# EAGLE board smart well (EAGLE 7.2.0)
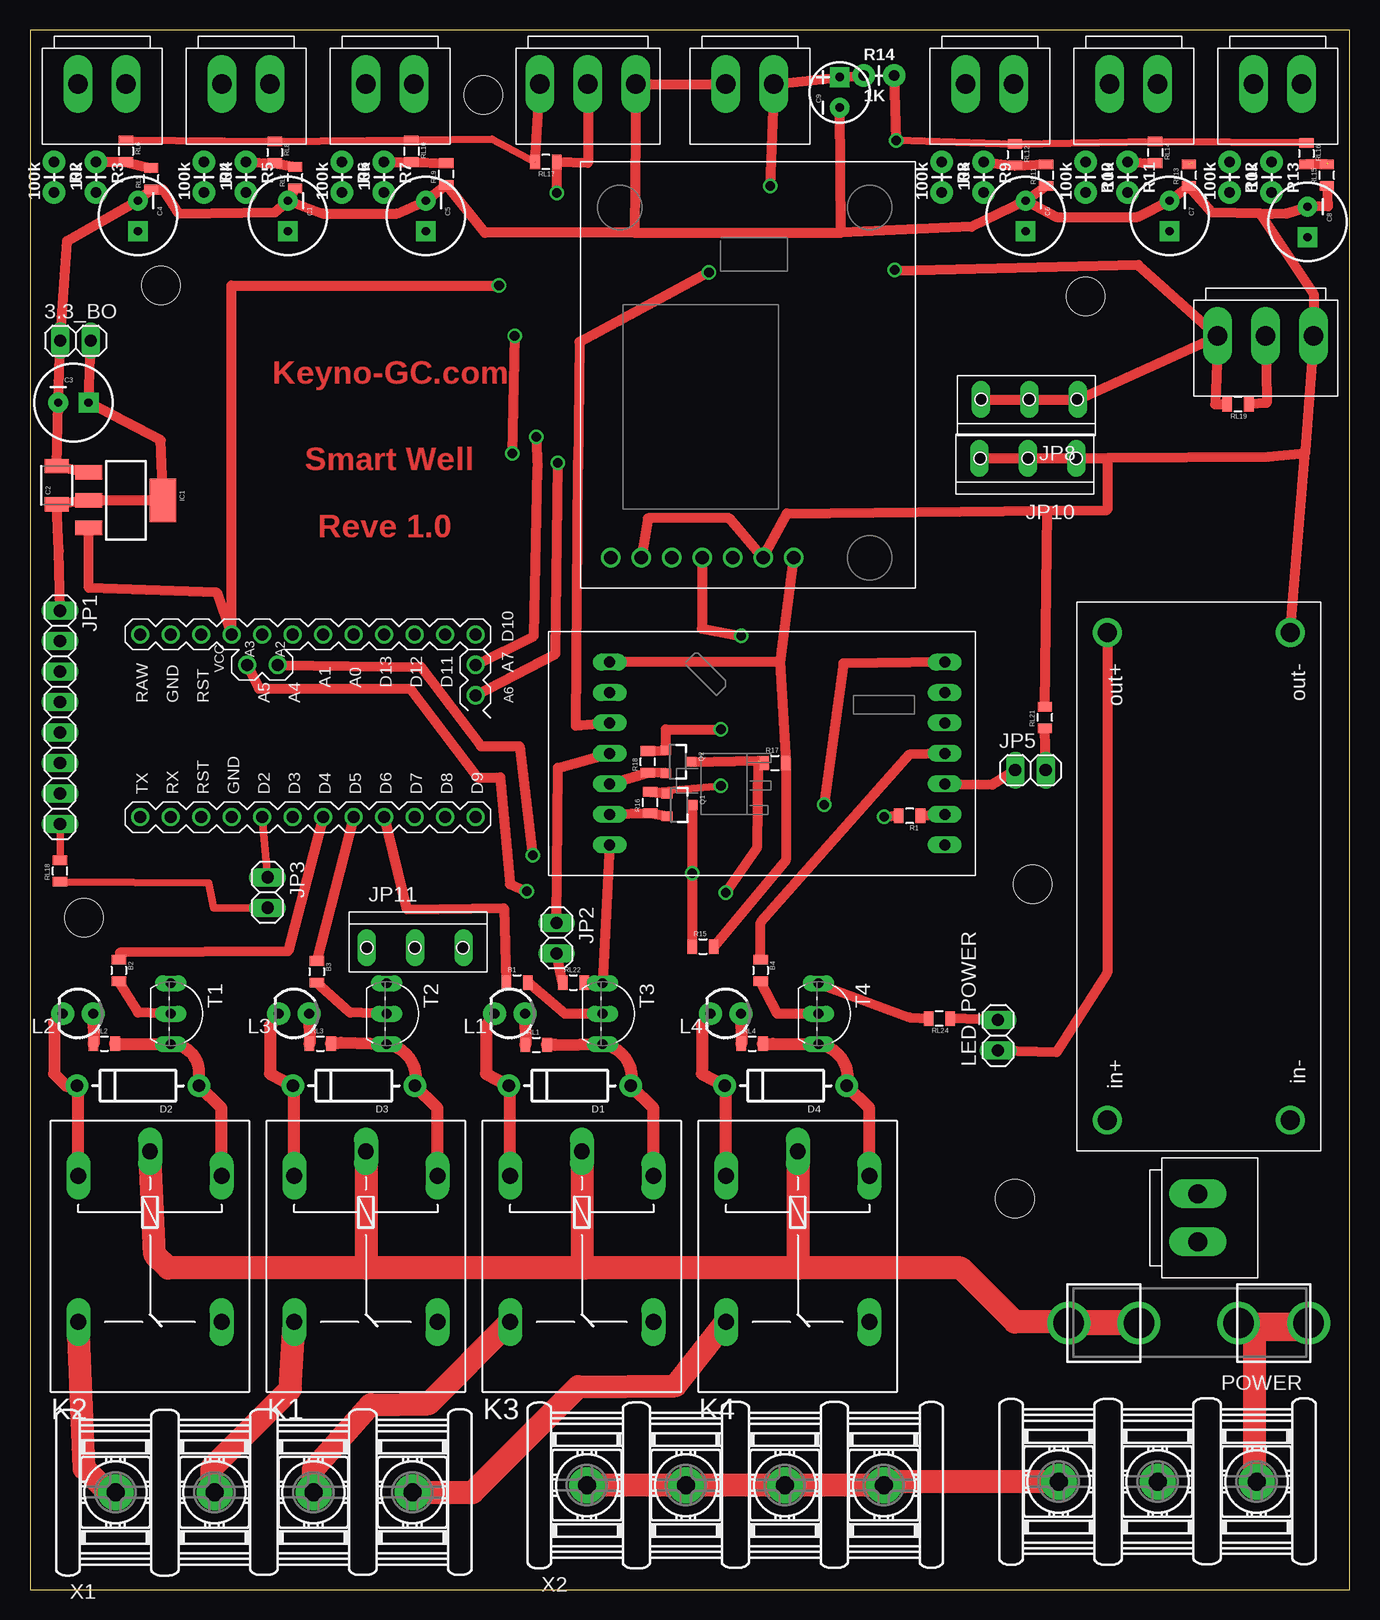
[diagram p0: board, top side]
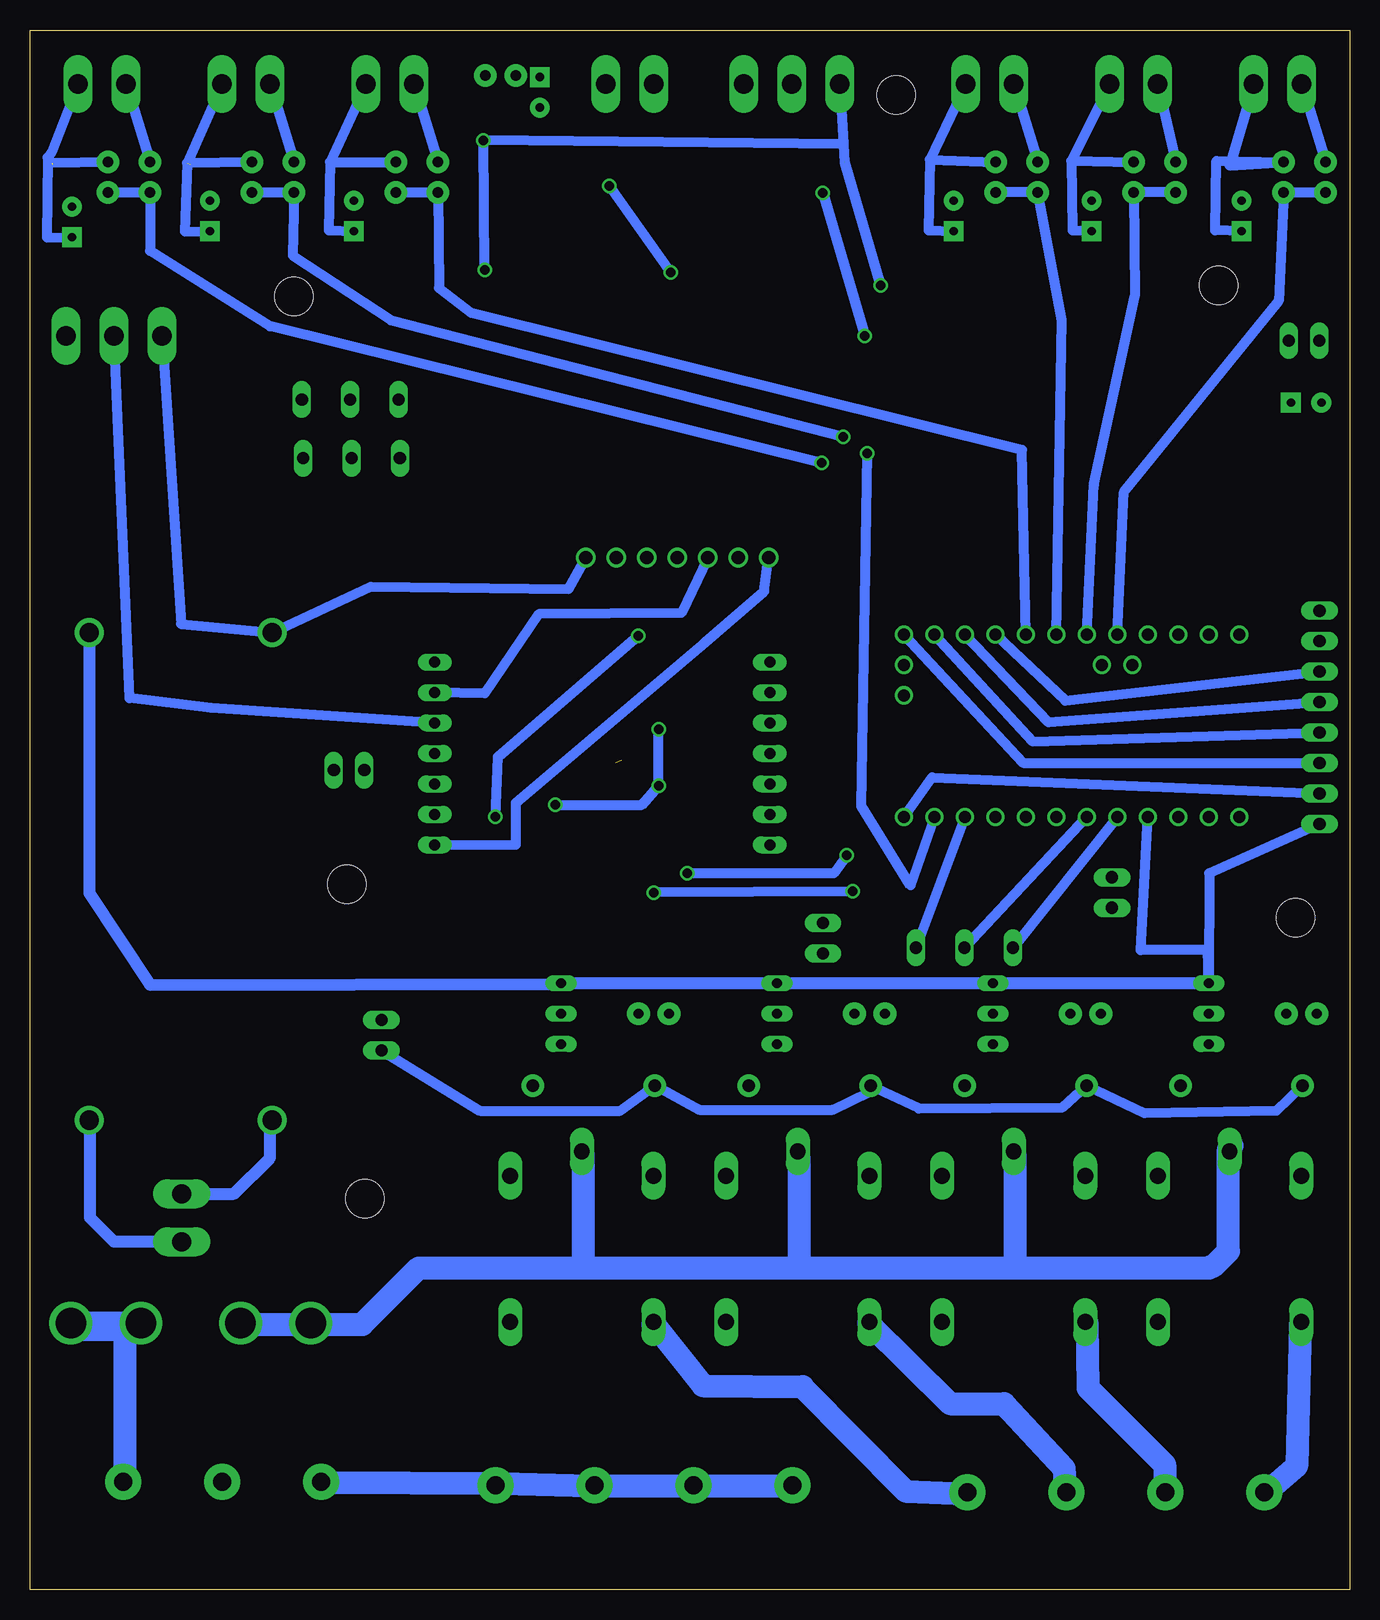
[diagram p1: board, bottom side, seen from below]

Size 110 x 130 mm. Coordinates in mm from the lower left corner, seen from the top.
Outline: 0,0 110,0 110,130 0,130 0,0
Copper layers (1*16): Top 0.035mm / dielectric 1.5mm / Bottom 0.035mm
Design rules "default *": minimum track width 20mil, minimum drill 24mil, track to track 8mil, track to pad 8mil, pad to pad 8mil, via to via 8mil, smd to smd 8mil, copper to edge 40mil, drill to drill 8mil, minimum pad ring 10mil, minimum via ring 8mil, stop-mask expansion 4mil, vias tented up to drill 0mil, thermal gap 10mil
Holes 3.2 mm at 82.1,32.6 4.5,56 83.6,58.8 10.9,108.7 88,107.8 37.8,124.6

## Footprints (pad centres in the part's own frame; a part is rotated, then mirrored left to right if it is on the bottom)
1X02 = drill 1.016 long: 1 -1.27,0; 2 1.27,0
0805 = smd 0.8 x 1.2: 1 -0.9,0; 2 0.9,0
CPOL-RADIAL-100UF-25V = drill 0.7 pad 1.651 square: 1 1.27,0 | drill 0.7 pad 1.651: 2 -1.27,0
1210 = smd 1.2 x 2: 1 -1.6,0; 2 1.6,0
CPOL-RADIAL-10UF-25V-KIT = drill 0.7 pad 1.651 square: 1 1.27,0 | drill 0.7 pad 1.651: 2 -1.27,0
PIN_LOCK1X2 = drill 1.6 long: P$1 -2,0; P$2 2,0
DIODE-1N4001-KIT = drill 1.016 pad 1.88: A -5.08,0; C 5.08,0
FUSE_5MM = drill 2.54 pad 3.556: 1 0,-10; 2 0,-4.158; 3 0,4.158; 4 0,10
SOT223 = smd 1.219 x 2.235: 1 -2.311,-3.099; 2 0,-3.099; 3 2.311,-3.099 | smd 3.6 x 2.2: 4 0,3.099
1X08 = drill 1.016 long: 1 -8.89,0; 2 -6.35,0; 3 -3.81,0; 4 -1.27,0; 5 1.27,0; 6 3.81,0; 7 6.35,0; 8 8.89,0
1X03 = drill 1.016 long: 1 -4.04,0; 2 0,0; 3 4.04,0
G5LE = drill 1.321 long: 1 -7.493,-5.969; 2 -7.493,5.969; O 4.699,5.969; P -9.525,0; S 4.699,-5.969
LED3MM = drill 0.813 pad 1.88: A -1.27,0; K 1.27,0
5202-03-N-02 = drill 1.5 pad 3: 1 -8.25,0; 2 0,0; 3 8.25,0
SOT23-3 = smd 0.8 x 0.9: 1 -0.95,-1; 2 0.95,-1; 3 0,1.1
AXIAL-0.1 = drill 0.9 pad 1.88: P$1 0,0; P$2 2.54,0
TO92-EBC-OVAL = drill 0.813 long: B 0,-1.27; C 2.54,-1.27; E -2.54,-1.27
PIN_LOCK1X3 = drill 1.6 long: P$1 4,0; P$2 0,0; P$3 -4,0
ESP12F_SHEILD10PIN = drill 0.9 long: 0 -7.62,-13.97; 2 -2.54,-13.97; 3.3V 7.62,-13.97; 4 -5.08,13.97; 5 -2.54,13.97; 5V 7.62,13.97; 12 2.54,-13.97; 13 5.08,-13.97; 14 0,-13.97; 15 -5.08,-13.97; 16 0,13.97; ADC 2.54,13.97; GND1 -7.62,13.97; RST 5.08,13.97
SIM800L = drill 1.1: 5V 7.62,-12.7; GND -5.08,-12.7; GND. 5.08,-12.7; RST -7.62,-12.7; RX -2.54,-12.7; TX 0,-12.7; VDD 2.54,-12.7
DC-DC = drill 1.6: I+ 22.86,-7.62; I- 22.86,7.62; O+ -17.78,-7.62; O- -17.78,7.62
ARDUINO_DIP = drill 1: A0 7.62,-5.08; A1 7.62,-2.54; A2 7.62,0; A3 7.62,2.54; A4 5.08,1.27; A5 5.08,3.81; A6 2.54,-15.24; A7 5.08,-15.24; D2 -7.62,2.54; D3 -7.62,0; D4 -7.62,-2.54; D5 -7.62,-5.08; D6 -7.62,-7.62; D7 -7.62,-10.16; D8 -7.62,-12.7; D9 -7.62,-15.24; D10 7.62,-15.24; D11 7.62,-12.7; D12 7.62,-10.16; D13 7.62,-7.62; GND 7.62,10.16; GND2 -7.62,5.08; RAW 7.62,12.7; RST 7.62,7.62; RST2 -7.62,7.62; RX -7.62,10.16; TX -7.62,12.7; VCC 7.62,5.08
5202-04-N-02 = drill 1.5 pad 3: 1 -12.375,0; 2 -4.125,0; 3 4.125,0; 4 12.375,0

## Placement (x,y rotation side)
3.3_BO  [1X02]  3.8,104.1 0 top
B1  0.22  [0805]  40.6,50.6 0 top
B2  0.22  [0805]  7.4,51.6 270 top
B3  0.22  [0805]  23.9,51.5 270 top
B4  0.22  [0805]  60.9,51.6 270 top
C1  [CPOL-RADIAL-100UF-25V]  21.5,114.5 270 top
C2  10uF  [1210]  2.23,92.05 90 top
C3  [CPOL-RADIAL-100UF-25V]  3.62,98.94 0 top
C4  [CPOL-RADIAL-100UF-25V]  9,114.5 270 top
C5  [CPOL-RADIAL-100UF-25V]  33,114.5 270 top
C6  [CPOL-RADIAL-100UF-25V]  83,114.5 270 top
C7  [CPOL-RADIAL-100UF-25V]  95,114.5 270 top
C8  [CPOL-RADIAL-100UF-25V]  106.5,114 270 top
C9  [CPOL-RADIAL-10UF-25V-KIT]  67.5,124.8 90 top
CT1  ct1  [PIN_LOCK1X2]  6,125.5 0 top
CT2  ct1  [PIN_LOCK1X2]  18,125.5 0 top
CT3  ct1  [PIN_LOCK1X2]  30,125.5 0 top
CT4  ct1  [PIN_LOCK1X2]  80,125.5 0 top
CT5  ct1  [PIN_LOCK1X2]  92,125.5 0 top
CT6  ct1  [PIN_LOCK1X2]  104,125.5 0 top
D1  [DIODE-1N4001-KIT]  45,42 180 top
D2  [DIODE-1N4001-KIT]  9,42 180 top
D3  [DIODE-1N4001-KIT]  27,42 180 top
D4  [DIODE-1N4001-KIT]  63,42 180 top
F1  FUSEX20MM  [FUSE_5MM]  96.6,22.2 270 top
IC1  [SOT223]  8,90.8 270 top
JP1  [1X08]  2.5,72.7 270 top
JP2  [1X02]  43.9,54.3 270 top
JP3  [1X02]  19.8,58.1 270 top
JP5  [1X02]  83.4,68.3 0 top
JP8  [1X03]  83.3,99.2 180 top
JP10  [1X03]  83.2,94.3 180 top
JP11  [1X03]  32.1,53.5 0 top
K1  relay 1  [G5LE]  28,27 270 top
K2  relay 1  [G5LE]  10,27 270 top
K3  relay 1  [G5LE]  46,27 270 top
K4  relay 1  [G5LE]  64,27 270 top
L1  [LED3MM]  40,48 180 top
L2  [LED3MM]  4,48 180 top
L3  [LED3MM]  22,48 180 top
L4  [LED3MM]  58,48 180 top
LED_POWER  LED Power  [1X02]  80.7,46.2 90 top
POWER  [5202-03-N-02]  94,9 180 top
Q1  BSS138  [SOT23-3]  54.1,65.4 270 top
Q2  BSS138  [SOT23-3]  54,69 270 top
R1  [0805]  73.33,64.49 180 top
R2  100k  [AXIAL-0.1]  2,119 270 top
R3  10k  [AXIAL-0.1]  5.5,119 270 top
R4  100k  [AXIAL-0.1]  14.5,119 270 top
R5  10k  [AXIAL-0.1]  18,119 270 top
R6  100k  [AXIAL-0.1]  26,119 270 top
R7  10k  [AXIAL-0.1]  29.5,119 270 top
R8  100k  [AXIAL-0.1]  76,119 270 top
R9  10k  [AXIAL-0.1]  79.5,119 270 top
R10  100k  [AXIAL-0.1]  88,119 270 top
R11  10k  [AXIAL-0.1]  91.5,119 270 top
R12  100k  [AXIAL-0.1]  100,119 270 top
R13  10k  [AXIAL-0.1]  103.5,119 270 top
R14  1K  [AXIAL-0.1]  69.5,126.2 0 top
R15  [0805]  56.1,53.6 0 top
R16  [0805]  51.7,65.6 90 top
R17  [0805]  62.1,68.9 0 top
R18  [0805]  51.5,69 90 top
RL1  0.22  [0805]  42.2,45.4 0 top
RL2  0.22  [0805]  6.2,45.5 0 top
RL3  0.22  [0805]  24.2,45.5 0 top
RL4  0.22  [0805]  60.2,45.5 0 top
RL5  0.22  [0805]  10.1,117.6 90 top
RL6  0.22  [0805]  8,119.9 270 top
RL7  0.22  [0805]  22.1,117.7 90 top
RL8  0.22  [0805]  20.4,119.8 270 top
RL9  0.22  [0805]  34.7,118 90 top
RL10  0.22  [0805]  31.8,119.9 270 top
RL11  0.22  [0805]  84.7,117.9 90 top
RL12  0.22  [0805]  82.1,119.6 270 top
RL13  0.22  [0805]  96.6,117.9 90 top
RL14  0.22  [0805]  93.8,119.8 270 top
RL15  0.22  [0805]  108.1,117.9 90 top
RL16  0.22  [0805]  106.4,119.7 270 top
RL17  [0805]  43,119 180 top
RL18  [0805]  2.5,59.9 90 top
RL19  [0805]  100.7,98.8 180 top
RL21  [0805]  84.6,72.7 90 top
RL22  [0805]  45.3,50.6 0 top
RL24  [0805]  75.8,47.6 180 top
T1  2N2222  [TO92-EBC-OVAL]  13,48 270 top
T2  2N2222  [TO92-EBC-OVAL]  31,48 270 top
T3  2N2222  [TO92-EBC-OVAL]  49,48 270 top
T4  2N2222  [TO92-EBC-OVAL]  67,48 270 top
U$2  PIN_LOCK_1X3  [PIN_LOCK1X3]  46.5,125.5 0 top
U$3  ESP12F_SHEILD10PIN  [ESP12F_SHEILD10PIN]  62.29,69.69 90 top
U$5  SIM800L  [SIM800L]  56.04,98.71 0 top
U$6  [DC-DC]  97.44,61.98 270 top
U$7  ARDUINO_DIP  [ARDUINO_DIP]  21.9,72 90 top
U$8  PIN_LOCK_1X3  [PIN_LOCK1X3]  103,104.5 0 top
U$9  PIN_LOCK_1X2  [PIN_LOCK1X2]  97.35,30.99 90 top
U$11  PIN_LOCK_1X2  [PIN_LOCK1X2]  60,125.5 0 top
X1  relay rail  [5202-04-N-02]  19.5,8.1 0 top
X2  phase  [5202-04-N-02]  58.8,8.7 0 top

## Library data of the parts
3.3_BO JP1-JP3 JP5 JP8 JP10 JP11 LED_POWER = pinhead2
B1-B4 R15-R18 RL1-RL19 RL21 RL22 RL24 = SparkFun-Resistors; PROD_ID: RES-09883
C1 C3-C8 = SparkFun-Capacitors; PROD_ID: CAP-08439
C2 = SparkFun-Capacitors; PROD_ID: CAP-09824
C9 = SparkFun-Capacitors; PROD_ID: CAP-08440
CT1-CT6 U$2 U$8 U$9 U$11 = ARDUINO_MODULE
D1-D4 = SparkFun-DiscreteSemi
F1 = SparkFun-Passives
IC1 = SparkFun-PowerIC; PROD_ID: VREG-08170
K1-K4 = relay; OC_FARNELL: unknown; OC_NEWARK: unknown
L1-L4 = SparkFun-LED
POWER X1 X2 = con-ebyelectro; OC_FARNELL: unknown; OC_NEWARK: unknown
Q1 Q2 = SparkFun-DiscreteSemi; PROD_ID: TRANS-00830
R1 = SparkFun-Resistors; PROD_ID: RES-11622
R2-R13 = SparkFun-Resistors; PROD_ID: RES-10698
R14 = SparkFun-Resistors; PROD_ID: RES-12182
T1-T4 = adafruit
U$3 U$5 U$6 = mysocket
U$7 = arduinopromini

## Nets
0: U$3.0 U$5.RST
3.3V_E: Q1.1 Q2.1 R16.2 R18.2 U$3.3.3V
+3V3: 3.3_BO.2 C2.1 C3.1 IC1.2 IC1.4 JP1.1
+5V: D1.C D2.C D3.C D4.C IC1.3 JP8.1 JP8.2 JP8.3 K1.1 K2.1 K3.1 K4.1 L1.K L2.K L3.K L4.K LED_POWER.1 R14.P$2 R15.2 R17.2 RL6.1 RL8.1 RL10.1 RL12.1 RL14.1 RL16.1 RL17.2 RL19.2 U$2.P$3 U$3.5V U$5.5V U$6.O+ U$7.VCC U$8.P$3
ADC_ESP: C9.1 R14.P$1 U$3.ADC U$11.P$2
CE: JP1.7 U$7.D9
CS: JP1.6 U$7.D10
CT1: R2.P$2 R3.P$2 U$7.A3
CT2: R6.P$2 R7.P$2 U$7.A1
CT3: R4.P$2 R5.P$2 U$7.A2
D2: JP3.1 JP11.1 U$7.D2
D3: JP11.2 U$7.D3
D7: JP11.3 U$7.D7
GND: 3.3_BO.1 C1.2 C2.2 C3.2 C4.2 C5.2 C6.2 C7.2 C8.2 C9.2 IC1.1 JP1.8 JP10.1 JP10.2 JP10.3 RL5.1 RL7.1 RL9.1 RL11.1 RL13.1 RL15.1 RL18.2 RL21.2 RL22.2 RL24.2 T1.E T2.E T3.E T4.E U$2.P$1 U$3.GND1 U$5.GND U$5.GND. U$6.O- U$7.GND2 U$8.P$1 U$11.P$1
IRQ: JP1.2
LED_MOTOR: JP5.1 U$3.2
LED_SIM: JP2.1 U$3.16
MISO: JP1.4 U$7.D12
MOSI: JP1.5 U$7.D11
N$1: R1.1 U$3.15
N$2: U$7.GND
N$6: U$6.I+ U$9.P$2
N$7: D2.A K2.2 RL2.2 T1.C
N$8: D3.A K1.2 RL3.2 T2.C
N$9: B2.2 T1.B
N$10: B3.2 T2.B
N$11: L2.A RL2.1
N$12: L3.A RL3.1
N$13: F1.3 POWER.1
N$14: D1.A K3.2 RL1.2 T3.C
N$15: L1.A RL1.1
N$16: B1.2 T3.B
N$17: D4.A K4.2 RL4.2 T4.C
N$18: L4.A RL4.1
N$19: B4.2 T4.B
N$20: U$6.I- U$9.P$1
N$21: CT2.P$1 R4.P$1
N$22: CT1.P$1 R2.P$1
N$23: C4.1 CT1.P$2 R3.P$1 RL5.2 RL6.2
N$24: C1.1 CT2.P$2 R5.P$1 RL7.2 RL8.2
N$25: CT3.P$1 R6.P$1
N$26: C5.1 CT3.P$2 R7.P$1 RL9.2 RL10.2
N$27: CT4.P$1 R8.P$1
N$28: C6.1 CT4.P$2 R9.P$1 RL11.2 RL12.2
N$29: CT5.P$1 R10.P$1
N$30: C7.1 CT5.P$2 R11.P$1 RL13.2 RL14.2
N$31: CT6.P$1 R12.P$1
N$32: C8.1 CT6.P$2 R13.P$1 RL15.2 RL16.2
N$35: JP5.2 RL21.1
N$36: JP2.2 RL22.1
N$38: LED_POWER.2 RL24.1
N$44: JP3.2 RL18.1
NULL: POWER.3 X2.1 X2.2 X2.3 X2.4
PHASE: F1.1 K1.P K2.P K3.P K4.P
R1: K2.S X1.1
R2: K1.S X1.2
R3: K3.S X1.3
R4: K4.S X1.4
RELAY14_ESP: B4.1 U$3.14
RI1: B2.1 U$7.D4
RI2: B3.1 U$7.D5
RI3: B1.1 U$7.D6
RX_ESP: R1.2 U$5.TX
S_D_A_D8: RL17.1 U$2.P$2 U$7.D8
S_D_ESP: RL19.1 U$3.12 U$8.P$2
SCK: JP1.3 U$7.D13
SCL: Q1.3 R15.1 U$7.A4
SCLE: Q1.2 R16.1 U$3.4
SDA: Q2.3 R17.1 U$7.A5
SDAE: Q2.2 R18.1 U$3.5
TX_ESP: U$3.13 U$5.RX
VU: R12.P$2 R13.P$2 U$7.A6
VV: R10.P$2 R11.P$2 U$7.A7
VW: R8.P$2 R9.P$2 U$7.A0

## Tracks (layer width: path | path; a pad name or v marks a point on that pad's centre or on a via)
0
  Bottom 0.813: U$3.0 69.5,62.1 69.5,65.6 53.7,79 48.8,83.2 U$5.RST
3.3V_E  (via drill 0.8)
  Top 0.61: R16.2 v57.6,67
  Top 0.813: R18.2 Q2.1 53,71.7 v57.6,71.7 | R16.2 Q1.1 | U$3.3.3V 67.8,77.2 v66.2,65.4
  Bottom 0.813: v57.6,71.7 v57.6,67 59,65.4 v66.2,65.4
+3V3
  Top 0.813: JP1.1 2.4,86.6 C2.1 IC1.2 IC1.4 10.9,95.8 C3.1 3.3_BO.2
+5V  (via drill 0.6, 0.8)  (1 unrouted)
  Top 0.61: RL6.1 RL8.1 RL10.1 38.5,120.9 RL17.2 | RL16.1 RL14.1 RL12.1 v72.2,120.8
  Top 0.813: U$8.P$3 98.8,98.8 RL19.2 | U$6.O+ 89.8,51.4 85.6,44.8 LED_POWER.1 | 56,43 v57.8,42 | RL17.2 42.5,125.6 | R14.P$2 v72.2,120.8 | U$5.5V 62.5,77.3 | 62.5,77.3 R17.2 63,60.8 R15.2 | 62.5,77.3 U$3.5V | U$8.P$3 92.4,110.4 72.1,109.9 v72.1,110 | IC1.3 4.9,83.5 15.6,83.1 U$7.VCC 16.8,108.7 v39.1,108.7 | JP8.3 JP8.2 JP8.1 U$8.P$3
  Top 1.016: K2.1 v4.03,41.89 D2.C 3,42 2,43 2,47.27 L2.K | K1.1 22.03,41.89 D3.C 20,43 20,47 L3.K | K3.1 40.03,41.89 D1.C 38,43 38,47 L1.K | K4.1 58.03,34.97 58,35 58,41.92 D4.C 56,43 56,47 L4.K
  Bottom 0.813: LED_POWER.1 72.5,39.9 60.8,39.9 D4.C | v57.8,42 54.2,40 43.1,40 40.03,41.5 D1.C 35.9,40.1 23.9,40.2 D3.C 17.1,39.7 6.1,39.9 v4.03,41.89 | U$8.P$3 97.4,80.5 U$6.O+ 81.6,83.6 65.1,83.4 U$5.5V | v72.1,110 v72.2,120.8 42.2,120.5 U$2.P$3 RL17.2 v39.1,108.7
ADC_ESP  (via drill 0.8)
  Top 0.813: R14.P$1 C9.1 U$11.P$2 v61.7,117 | U$3.ADC 45.5,72 45.7,93.5 | 45.7,93.5 45.7,94.1 | v56.6,109.8 45.8,104 45.7,93.5
  Bottom 0.813: v61.7,117 v56.6,109.8
CE
  Bottom 0.813: U$7.D9 34.8,67.7 JP1.7
CS
  Bottom 0.813: U$7.D10 27.2,68.9 JP1.6
CT1
  Bottom 0.813: R2.P$2 R3.P$2 5.9,107.4 18.8,91.5 U$7.A3
CT2
  Bottom 0.813: R7.P$2 R6.P$2 24,105.8 U$7.A1
CT3
  Bottom 0.813: R4.P$2 R5.P$2 17.9,107.8 21.3,92.1 U$7.A2
D2
  Top 0.61: U$7.D2 JP3.1
  Bottom 0.813: U$7.D2 JP11.1
D3
  Bottom 0.813: U$7.D3 JP11.2
D7
  Bottom 0.813: U$7.D7 JP11.3
GND  (via drill 0.6)
  Top 0.61: JP1.8 RL18.2
  Top 0.813: RL15.1 108.2,115.3 C8.2 104.7,114.7 | C1.2 20.4,114.8 12.4,114.7 11.1,116.7 RL5.1 C4.2 3.1,112.4 3.3_BO.1 C3.2 C2.2 IC1.1 | RL7.1 C1.2 | C1.2 24.4,114.7 30.6,114.7 C5.2 RL9.1 37.9,113.1 50.4,113.1 | C6.2 RL11.1 | C6.2 85.6,114.4 92.3,114.4 C7.2 RL13.1 98.5,114.8 104.7,114.7 | U$11.P$1 U$2.P$1 50.4,113.1 | 104.7,114.7 102.6,114.6 107,108 U$8.P$1 106.32,95 | v65.79,50.5 73.3,47.7 RL24.2 | C6.2 78.5,113.6 67.6,113.1 | 67.6,113.1 C9.2 | 50.4,113.1 67.6,113.1 | 89.8,94.3 103.2,94.4 106.3,94.7 106.32,95 | 89.8,94.3 89.8,90 84.79,89.94 | RL22.2 T3.E U$3.GND1 | 84.79,89.94 63.1,89.7 U$5.GND. 58.3,89.3 51.5,89.3 U$5.GND | U$6.O- 106.32,95 | RL21.2 84.79,89.94 | JP10.3 JP10.2 JP10.1 89.8,94.3
  Bottom 0.813: U$7.GND2 17.4,53.3 11.8,53.3 T1.E 11.7,59.7 JP1.8
  Bottom 1.016: T1.E T2.E T3.E T4.E v65.79,50.5 100,50.4 105.06,58.06 U$6.O-
LED_MOTOR
  Top 0.813: U$3.2 80.2,67.1 JP5.1
LED_SIM
  Top 0.813: JP2.1 44,68.5 U$3.16
MISO
  Bottom 0.813: U$7.D12 25.1,72.3 JP1.4
MOSI
  Bottom 0.813: U$7.D11 26.4,70.7 JP1.5
N$1
  Top 0.813: U$3.15 R1.1
N$3  (via drill 0.8)
  other vias: 56.6,109.8
N$4
  Bottom 1.93: 106.6,22 100.9,22 100.9,22.2 107.2,22.2 107.2,21.7 102.1,21.7 102.1,9.4
N$5
  Bottom 1.93: 92.8,22.1 82.3,22.1 77.6,26.8 11.7,26.8 11.6,26.9 11.4,26.9 10.1,28.2 10.1,36.7 9.8,37
N$6
  Bottom 1.016: U$9.P$2 93.01,32.99 90,36 90,38.94 U$6.I+
N$7
  Top 1.016: K2.2 15.97,40.11 D2.A 14.08,43.11 arc90 T1.C 7.9,45.46 RL2.2
N$8
  Top 1.016: K1.2 33.97,40.11 D3.A arc95 T2.C 25.9,45.6 RL3.2
N$9
  Top 0.813: T1.B 9,48.1 B2.2
N$10
  Top 0.813: T2.B 26.7,48.1 B3.2
N$11
  Top 1.016: L2.A RL2.1
N$12
  Top 1.016: L3.A RL3.1
N$13
  Top 1.93: POWER.1 102.1,9 102.1,21.7 106.7,21.7 106.7,22.1 100.76,22.1 F1.3
N$14
  Top 1.016: K3.2 51.97,40.11 D1.A arc95 T3.C 43.8,45.4 43.3,45.5 RL1.2
N$15
  Top 1.016: L1.A RL1.1
N$16
  Top 0.813: T3.B 44.6,48 B1.2
N$17
  Top 1.016: K4.2 69.97,40.11 D4.A arc95 T4.C 61.9,45.5 RL4.2
N$18
  Top 1.016: L4.A RL4.1
N$19
  Top 0.813: T4.B 62.3,48 B4.2
N$20
  Bottom 1.016: U$9.P$1 102.99,28.99 105,31 105,39.06 U$6.I-
N$21
  Bottom 0.813: CT2.P$1 R4.P$1
N$22
  Bottom 0.813: CT1.P$1 R2.P$1
N$23
  Top 0.813: R3.P$1 RL6.2 RL5.2
  Bottom 0.813: CT1.P$2 10,118.7 R3.P$1 11.1,119.1 11.2,113.3 C4.1
N$24
  Top 0.813: R5.P$1 RL8.2 RL7.2
  Bottom 0.813: CT2.P$2 23.2,119.1 | 23.2,119.1 23.1,113.3 C1.1 | 23.2,119.1 R5.P$1
N$25
  Bottom 0.813: CT3.P$1 R6.P$1
N$26
  Top 0.813: R7.P$1 RL10.2 RL9.2
  Bottom 0.813: CT3.P$2 35,119.2 | 35,119.2 35.1,113.3 C5.1 | 35,119.2 R7.P$1
N$27
  Bottom 0.813: CT4.P$1 R8.P$1
N$28
  Top 0.813: R9.P$1 RL12.2 RL11.2
  Bottom 0.813: CT4.P$2 85,119 | 85,119 85.1,113.3 C6.1 | 85,119 R9.P$1
N$29
  Bottom 0.813: CT5.P$1 R10.P$1
N$30  (1 unrouted)
  Top 0.813: R11.P$1 RL14.2
  Bottom 0.813: CT5.P$2 96.9,118.9 | 96.9,118.9 97.1,113.2 C7.1 | R11.P$1 96.9,118.9
N$31
  Bottom 0.813: CT6.P$1 R12.P$1
N$32  (1 unrouted)
  Top 0.813: RL15.2 RL16.2
  Bottom 0.813: CT6.P$2 108.2,119.8 108.53,119.36 | 108.53,119.36 108.6,112.7 C8.1 | R13.P$1 108.2,118.9 108.53,119.36
N$33
  Bottom 1.93: 27.9,36.3 27.9,27 28,26.9
N$34
  Bottom 1.93: 45.9,36.1 45.9,27.2 46.1,27
N$35
  Top 0.813: JP5.2 RL21.1
N$36
  Top 0.813: RL22.1 JP2.2
N$37
  Bottom 1.93: 63.9,36.4 63.9,27.2 64.1,27
N$38
  Top 0.813: LED_POWER.2 RL24.1
N$39
  Bottom 1.93: 58.1,22.1 58,22.1 53.9,17 45.6,16.9 37,8.2 32,8
N$40
  Bottom 1.93: 40.1,22.2 33.3,15.5 28.8,15.5 23.8,10.1 23.7,8.3
N$41
  Bottom 1.93: 21.9,22.3 21.8,16.8 15.4,10.4 15.4,8
N$42
  Bottom 1.93: 4.1,22.1 4.4,10.3 7.2,7.9
N$43
  Bottom 1.93: 46.2,8.6 63.2,8.6 70.8,8.8 85.8,8.9
N$44
  Top 0.61: JP3.2 15.3,56.8 14.9,58.9 RL18.1
NULL
  Top 1.93: POWER.3 71.17,9 X2.4 X2.3 X2.2 X2.1
PHASE
  Top 1.93: F1.1 92.4,22.2 92.5,22.3 82.1,22.3 77.6,26.8 64.1,26.8 | 64.1,26.8 46.3,26.8 | 46.3,26.8 28,26.8 | 28,26.8 11.5,26.8 10.4,27.9 10,36.02 K2.P | K4.P 64,26.9 64.1,26.8 | K3.P 46,27.1 46.3,26.8 | K1.P 28,26.8
R1
  Top 1.93: X1.1 6.5,8.1 4.5,10.1 4,22.23 K2.S
R2
  Top 1.93: X1.2 15.3,8.1 15.2,8.2 15.2,10.2 21.7,16.7 22,22.17 K1.S
R3
  Top 1.93: X1.3 23.62,10.03 28.4,15.4 33.23,15.5 K3.S
R4
  Top 1.93: X1.4 36.9,8.1 45.7,16.9 53.83,17 K4.S
RELAY14_ESP
  Top 0.813: B4.1 60.9,55.6 73.3,69.6 U$3.14
RI1
  Top 0.813: U$7.D4 21.5,53.2 7.5,53.1 B2.1
RI2
  Top 0.813: U$7.D5 B3.1
RI3
  Top 0.813: U$7.D6 31.4,56.7 39.5,56.8 B1.1
RX_ESP  (via drill 0.8)
  Top 0.813: U$5.TX 56,80.1 v59.3,79.5 | R1.2 v71.2,64.4
  Bottom 0.813: v59.3,79.5 71,69.4 v71.2,64.4
S_D_A_D8  (via drill 0.8)
  Top 0.813: U$2.P$2 46.5,118.9 RL17.1 v43.9,116.4 | v40.4,104.5 v40.2,94.7
  Bottom 0.813: U$7.D8 36.6,58.7 40.7,65.3 v40.2,94.7 | v43.9,116.4 v40.4,104.5
S_D_ESP
  Top 0.813: U$8.P$2 103.1,98.9 RL19.1
  Bottom 0.813: U$3.12 94.9,73.5 101.7,74.3 U$8.P$2
SCK
  Bottom 0.813: U$7.D13 23.7,74.1 JP1.3
SCL  (via drill 0.8)
  Top 0.813: Q1.3 v55.2,59.7 R15.1 | U$7.A4 32.6,76.9 37.6,70.3 40.8,70.3 v41.9,61.2
  Bottom 0.813: v41.9,61.2 43,59.7 v55.2,59.7
SCLE
  Top 0.813: Q1.2 R16.1 U$3.4
SDA  (via drill 0.8)  (1 unrouted)
  Top 0.813: Q2.3 60.7,69.1 60.6,61.8 v58,58.1 | U$7.A5 19.1,75.1 31.7,75.1 37.3,67.7 39.2,67.7 40,58.8 v41.4,58.2
  Bottom 0.813: v41.4,58.2 v58,58.1
SDAE
  Top 0.813: Q2.2 R18.1 U$3.5
TX_ESP
  Bottom 0.813: U$5.RX 55.7,81.4 67.6,81.3 72.1,74.7 U$3.13
VU  (via drill 0.8)
  Top 0.813: U$7.A6 43.8,78 v44,93.9
  Bottom 0.813: R13.P$2 R12.P$2 100,111.6 90,105.3 v44,93.9
VV  (via drill 0.8)
  Top 0.813: U$7.A7 42,79.5 42.3,93.5 v42.2,96.1
  Bottom 0.813: R11.P$2 R10.P$2 88.1,111.2 79.9,105.8 v42.2,96.1
VW
  Bottom 0.813: R9.P$2 R8.P$2 75.9,108.5 73.2,106.4 27.3,95 U$7.A0

## Text on the board
Top: Keyno-GC.com | Smart Well | Reve 1.0